# Altium PCB PCB2.PcbDoc
Units mil, origin at the board's own origin, x right, y up, seen from the top; angles counter-clockwise.
Board outline 4055 x 1975 mil, 2 copper layers (Top Layer, Bottom Layer); 13 components, 8 nets, 37 pads, 0 vias.
Unrouted connection lines stored in the file: 3.
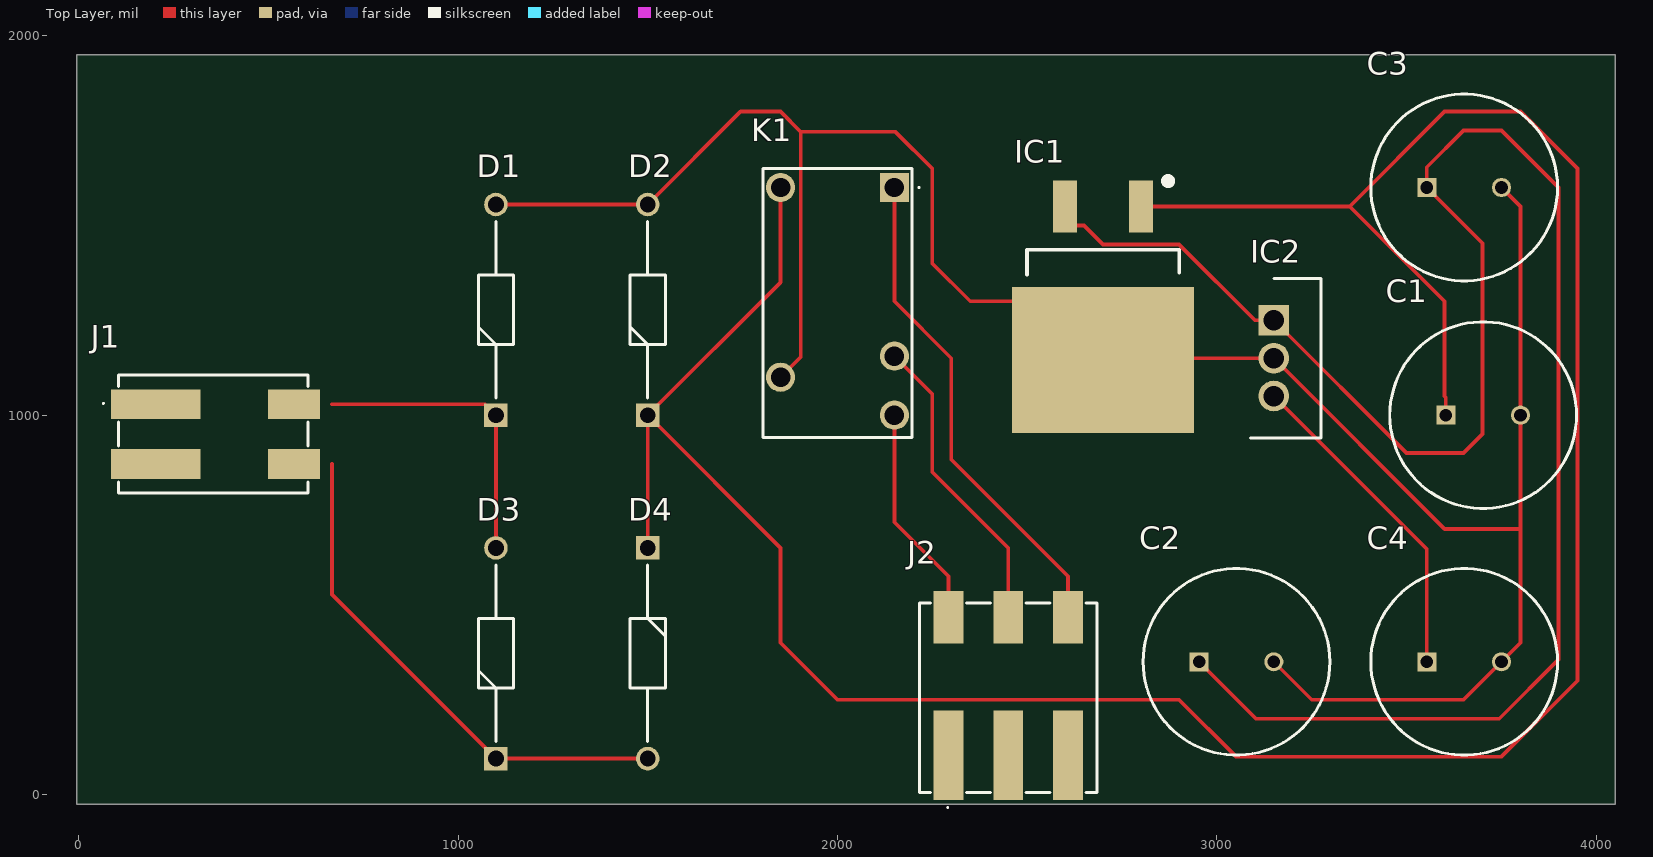
[diagram p0: Top Layer view]
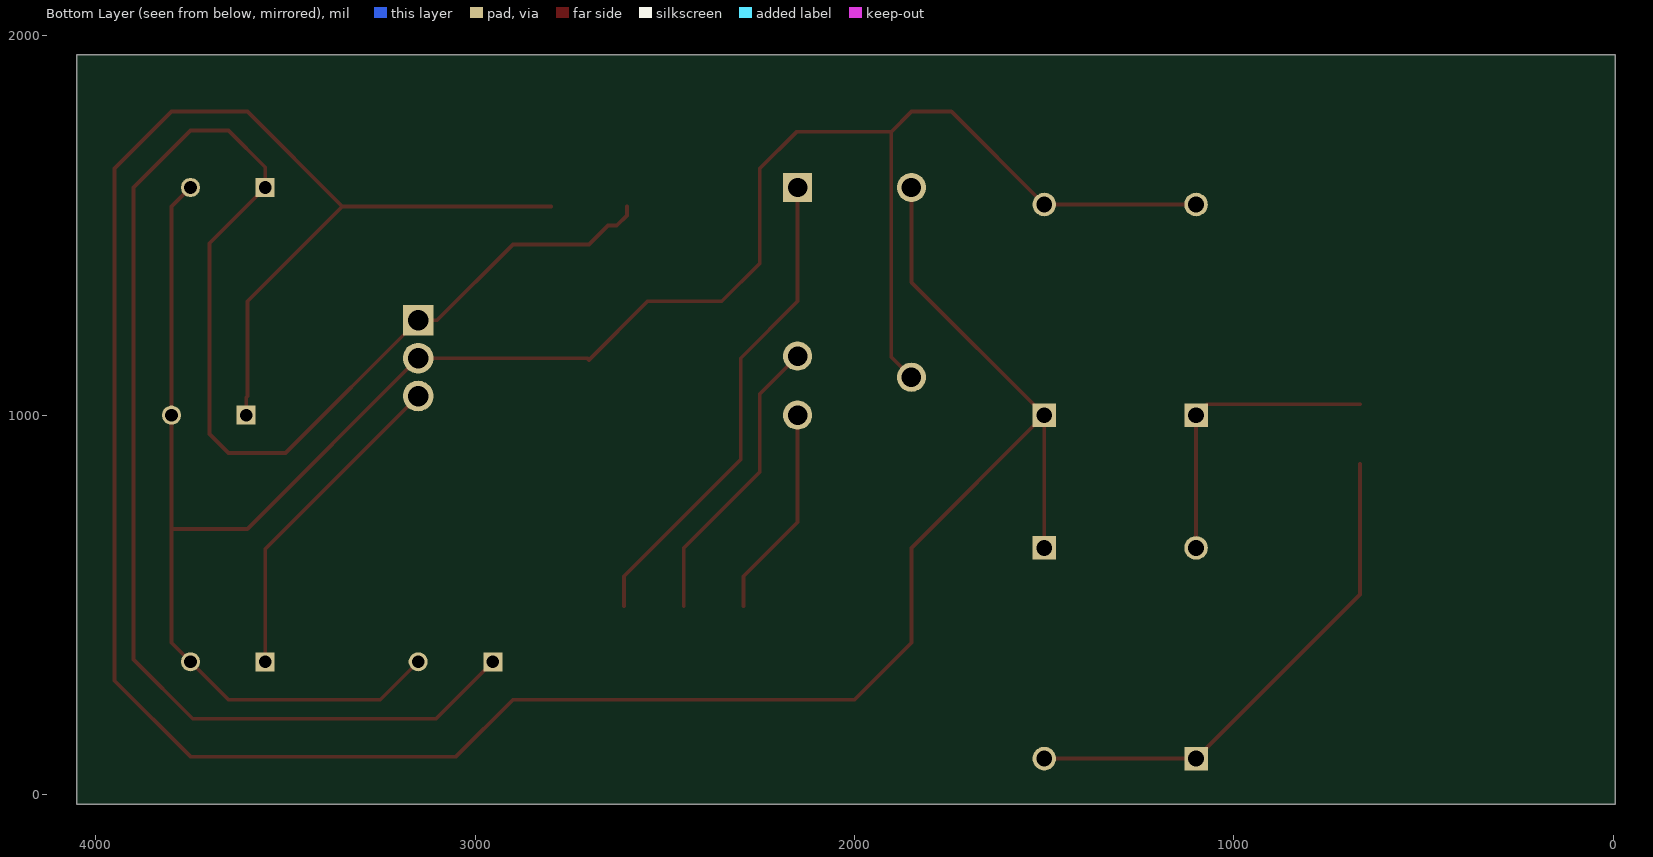
[diagram p1: Bottom Layer view, seen from below]
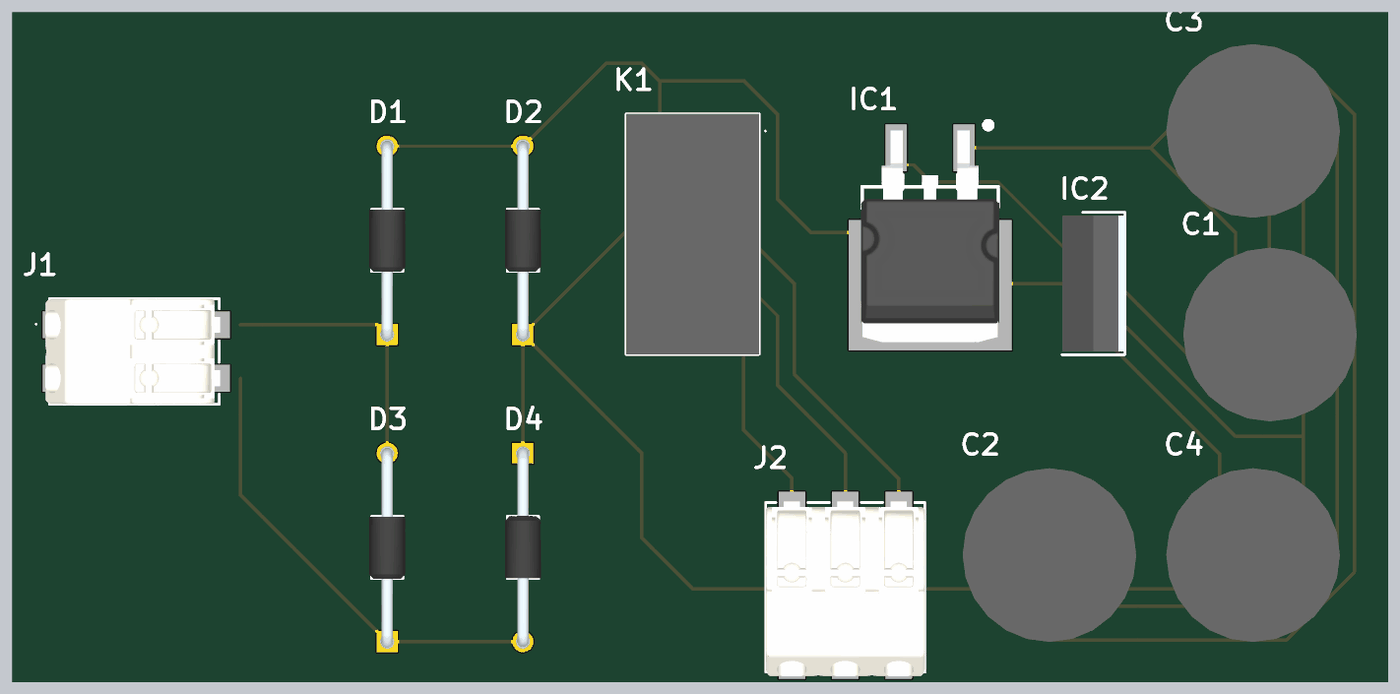
[diagram p2: 3D render of the assembled board from above, using the file's embedded part models]

## Layer stack, top to bottom
Top Solder: solder mask 0.4, Solder Resist, Dk 3.5
Top Layer: signal copper 1.4
Dielectric 1: dielectric 12.6, FR-4, Dk 4.8
Bottom Layer: signal copper 1.4
Bottom Solder: solder mask 0.4, Solder Resist, Dk 3.5

## Board outline
-5,-25 4050,-25 4050,1950 -5,1950

## Design rules (kind name [scope] priority, off if disabled: settings)
Clearance [All] p1: gap=10 ignorepadtopadclearanceinfootprint=FALSE except(0: Arc-Hole Track-Hole SMDPad-Hole THPad-Hole Via-Hole Fill-Hole Poly-Hole Region-Hole Text-Hole)
PolygonConnect [All] p1: connectstyle=Relief reliefconductorwidth=10 reliefentries=4 polygonreliefangle="90 Angle" airgapwidth=10
RoutingVias [All] p1: holewidth=28 width=50 viastyle="Through Hole" minholewidth=28 minwidth=50 maxholewidth=28 maxwidth=50
SolderMaskExpansion [All] p1: expansion=4 istentingtop=FALSE
Width [All] p1: maxlimit=10 minlimit=10 preferedwidth=10
30 further rules are at their usual default settings.

## Components (designator, comment, footprint, x,y, rotation, side; value= is the part's Value field where it differs from the comment)
C1 "100uf" CAPPRD500W65D1250H2700 3603.15,1000 r0 top
C2 "100uf" CAPPRD500W65D1250H2700 2953.15,350 r0 top
C3 "100uf" CAPPRD500W65D1250H2700 3553.15,1600 r0 top
C4 "100uf" CAPPRD500W65D1250H2700 3553.15,350 r0 top
D1 "1N4007-E3_73" DIOAD1405W86L465D235 1100,1000 r90 top
D2 "1N4007-E3_73" DIOAD1405W86L465D235 1500,1000 r90 top
D3 "1N4007-E3_73" DIOAD1405W86L465D235 1100,94.88 r90 top
D4 "1N4007-E3_73" DIOAD1405W86L465D235 1500,650 r270 top
IC1 "L7805ACD2T-TR" D2PAK-STB35NF10T4 2499.21,1435.67 r90 top
IC2 "LM7812ACT" TO254P470X1016X2019-3P 3150,1250 r270 top
J1 "2060-452_998-404" 2060452998404 350,950 r0 top
J2 "2060-453_998-404" 2060453998404 2450,250 r90 top
K1 "J0971CS5VDC.45" J0971CS5VDC45 2150,1600 r270 top

## Footprints (in the part's own frame and the unit in brackets; to place one, negate y for a bottom-side part, rotate by r counter-clockwise, add the part's x,y. Pads: shape width x height; smd on the part's side, far side on the other; paste and mask are expansions set on the pad)
2060452998404 [mm]
  rect 6x2 smd: 1(-3.725,2) 3(-3.725,-2)
  rect 3.5x2 smd: 2(5.525,2) 4(5.525,-2)
  silkscreen extent -7.27,-3.95 6.48,3.95, body extent -6.55,-3.95 6.55,3.95, height 4.5
2060453998404 [mm]
  rect 6x2 smd: 1(-3.725,4) 3(-3.725,0) 5(-3.725,-4)
  rect 3.5x2 smd: 2(5.525,4) 4(5.525,0) 6(5.525,-4)
  silkscreen extent -7.27,-5.95 6.48,5.95, body extent -6.55,-5.95 6.55,5.95, height 4.5
CAPPRD500W65D1250H2700 [mm]
  rect 1.275x1.275 hole 0.85: 1(0,0)
  round 1.275 hole 0.85: 2(5,0)
  silkscreen extent -3.75,-6.25 8.75,6.25, body extent -3.99,-6.5 9,6.5, height 27
D2PAK-STB35NF10T4 [mm]
  rect 3.5x1.6 smd: 1(2.904,-7.64) 3(2.904,-2.56)
  rect 9.75x12.2 smd: 4(-7.371,-5.1)
  silkscreen extent -1.64,-10.2 4.82,0, body extent -11.64,-10.28 4.25,0.08, height 4.6
DIOAD1405W86L465D235 [mm]
  rect 1.575x1.575 hole 1.05: 1(0,0)
  round 1.575 hole 1.05: 2(14.1,0)
  silkscreen extent 1.14,-1.17 12.96,1.17, body extent -0.43,-1.34 14.48,1.34, height 2.7
J0971CS5VDC45 [mm]
  rect 1.95x1.95 hole 1.3: 1(0,0)
  round 1.95 hole 1.3: 2(0,-7.62) 3(12.7,-7.62) 4(15.24,0) 5(11.29,0)
  silkscreen extent -1.27,-8.78 16.73,1.7, body extent -1.28,-8.78 16.74,1.17, height 15.4
TO254P470X1016X2019-3P [mm]
  rect 2.055x2.055 hole 1.37: 1(0,0)
  round 2.055 hole 1.37: 2(2.535,0) 3(5.07,0)
  silkscreen extent -2.8,-1.55 7.87,3.15, body extent -2.55,-1.55 7.61,3.15, height 18.54

## Part data
C1 C2 C3 C4: library part EEUTA1E102LB, "Capacitor Polarised", Manufacturer_Name=Panasonic, Datasheet Link=http://industrial.panasonic.com/cdbs/www-data/pdf/RDF0000/ABA0000C1212.pdf, Height=27mm, Manufacturer_Part_Number=EEUTA1E102LB
D1 D2 D3 D4: "Diode", Arrow Part Number=1N4007-E3/73, Manufacturer_Name=Vishay, Mouser Part Number=625-1N4007-E3/73, Arrow Price/Stock=https://www.arrow.com/en/products/1n4007-e373/vishay?region=europe, Datasheet Link=https://mouser.componentsearchengine.com/Datasheets/2/1N4007-E3_73.pdf, Manufacturer_Part_Number=1N4007-E3/73, Mouser Price/Stock=https://www.mouser.co.uk/ProductDetail/Vishay-General-Semiconductor/1N4007-E3-73?qs=N4vtoAxH%2FSqT3Ng3e4K0Gw%3D%3D
IC1: "Integrated Circuit", Manufacturer_Name=STMicroelectronics, Mouser Part Number=511-L7805ACD2T-TR, Arrow Part Number=L7805ACD2T-TR, Arrow Price/Stock=https://www.arrow.com/en/products/l7805acd2t-tr/stmicroelectronics?region=europe, Datasheet Link=http://www.st.com/web/en/resource/technical/document/datasheet/CD00000444.pdf, Manufacturer_Part_Number=L7805ACD2T-TR, Mouser Price/Stock=https://www.mouser.co.uk/ProductDetail/STMicroelectronics/L7805ACD2T-TR?qs=Ctxo64yJVFuOLXlPPZdJUQ%3D%3D
IC2: "Integrated Circuit", Manufacturer_Name=onsemi, Mouser Part Number=512-LM7812ACT, Arrow Part Number=LM7812ACT, Arrow Price/Stock=https://www.arrow.com/en/products/lm7812act/on-semiconductor, Datasheet Link=https://datasheet.datasheetarchive.com/originals/distributors/Datasheets_SAMA/704b005d7d2d9ced5864f40b6609c1bc.pdf, Height=4.7mm, Manufacturer_Part_Number=LM7812ACT, Mouser Price/Stock=https://www.mouser.com/Search/Refine.aspx?Keyword=512-LM7812ACT
J1: "Connector", Arrow Part Number=2060-452/998-404, Manufacturer_Name=Wago, Arrow Price/Stock=https://www.arrow.com/en/products/2060-452998-404/wago-kontakttechnik-gmbh?region=nac, Datasheet Link=https://www.wago.com/2060-452/998-404, Height=4.5mm, Manufacturer_Part_Number=2060-452/998-404
J2: "Connector", Arrow Part Number=2060-453/998-404, Manufacturer_Name=Wago, Arrow Price/Stock=https://www.arrow.com/en/products/2060-453998-404/wago-kontakttechnik-gmbh?region=europe, Datasheet Link=https://www.wago.com/2060-453/998-404, Height=4.5mm, Manufacturer_Part_Number=2060-453/998-404
K1: "Relay or Contactor", Manufacturer_Name="CIT Relay & Switch", Datasheet Link="https://www.citrelay.com/Catalog Pages/RelayCatalog/J097.pdf", Height=15.3mm, Manufacturer_Part_Number=J0971CS5VDC.45

## Nets (pads, with @x,y where several pads share a name; then routed paths per layer and width w, separated by ;. In a path a pad name is that pad's centre, name@x,y a point inside that pad or via, vN(x,y) a via of type N, cw(c..) or ccw(c..) an arc to the next point about the centre after c; other vN are vias at no path point)
NetC1_1: C1.1 D2.1 D4.1 IC1.1 K1.2 | length 7473.9
  Top Layer w10: D4.1 D2.1 ; K1.2 1850,1350 D2.1 ; IC1.1 3350,1550 ; C1.1@3600,1003.15 3600,1000 C1.1 3603.15,1046.85 3600,1050 3600,1300 3350,1550 ; D2.1 1850,650 1850,400 2000,250 2900,250 3050,100 3750,100 3950,300 3950,1650 3800,1800 3600,1800 3350,1550
NetC1_2: C1.2 C2.2 C3.2 C4.2 D1.1 D1.2 D2.2 D3.2 IC1.4 IC2.2 J1.2 K1.3 | length 6857.3
  Top Layer w10: 667.52,1028.74 1071.26,1028.74 D1.1 D3.2 ; D1.2 1100,1550 1105.12,1555.12 D2.2 ; D2.2@1500,1550 D2.2 ; K1.3 1903.39,1153.39 1903.39,1746.61 ; C2.2 3250,250 3650,250 C4.2 3800,400 3800,700 ; C3.2 3800,1550 C1.2 3800,700 ; D2.2 1744.88,1800 1850,1800 1903.39,1746.61 ; 1903.39,1746.61 2153.39,1746.61 2250,1650 2250,1400 2350,1300 2545.47,1300 IC1.4 2704.72,1150.2 IC2.2 3150,1150 3150.2,1150 3600.2,700 3800,700
NetC2_1: C2.1 C3.1 IC1.3 IC2.1 | length 4940.8
  Top Layer w10: IC1.3 2600,1526.5 2626.5,1500 2650,1500 2700,1450 2900,1450 3100,1250 IC2.1 3500,900 3650,900 3700,950 3700,1453.15 C3.1 3553.15,1653.15 3650,1750 3750,1750 3900,1600 3900,355.86 3744.14,200 3103.15,200 C2.1 2950,350 C2.1@2950,353.15
NetC4_1: C4.1 IC2.3 | length 867.6
  Top Layer w10: IC2.3 3150,1050 3150.39,1050 3553.15,647.24 C4.1
NetD3_1: D3.1 D4.2 J1.4 | length 1355.5
  Top Layer w10: 667.52,871.26 667.52,527.36 D3.1 D4.2
NetJ2_2: J2.2 K1.4 | length 562.4
  Top Layer w10: K1.4 2150,717.91 2292.52,575.39 J2.2@2292.52,496.65
NetJ2_4: J2.4 K1.5 | length 786.4
  Top Layer w10: K1.5 2150,1150 2155.51,1150 2250,1055.51 2250,850 2450,650 J2.4@2450,496.65
NetJ2_6: J2.6 K1.1 | length 1292.8
  Top Layer w10: K1.1 2150,1300 2300,1150 2300,882.87 2607.48,575.39 J2.6@2607.48,496.65
pads on no net: J1.1 J1.3 J2.1 J2.3 J2.5